# Altium PCB AmpClick2.PcbDoc
Units mm, origin at the board's own origin, x right, y up, seen from the top; angles counter-clockwise.
Board outline 25.4 x 57.28 mm, 2 copper layers (Top Layer, Bottom Layer); 43 components, 30 nets, 134 pads, 39 vias.
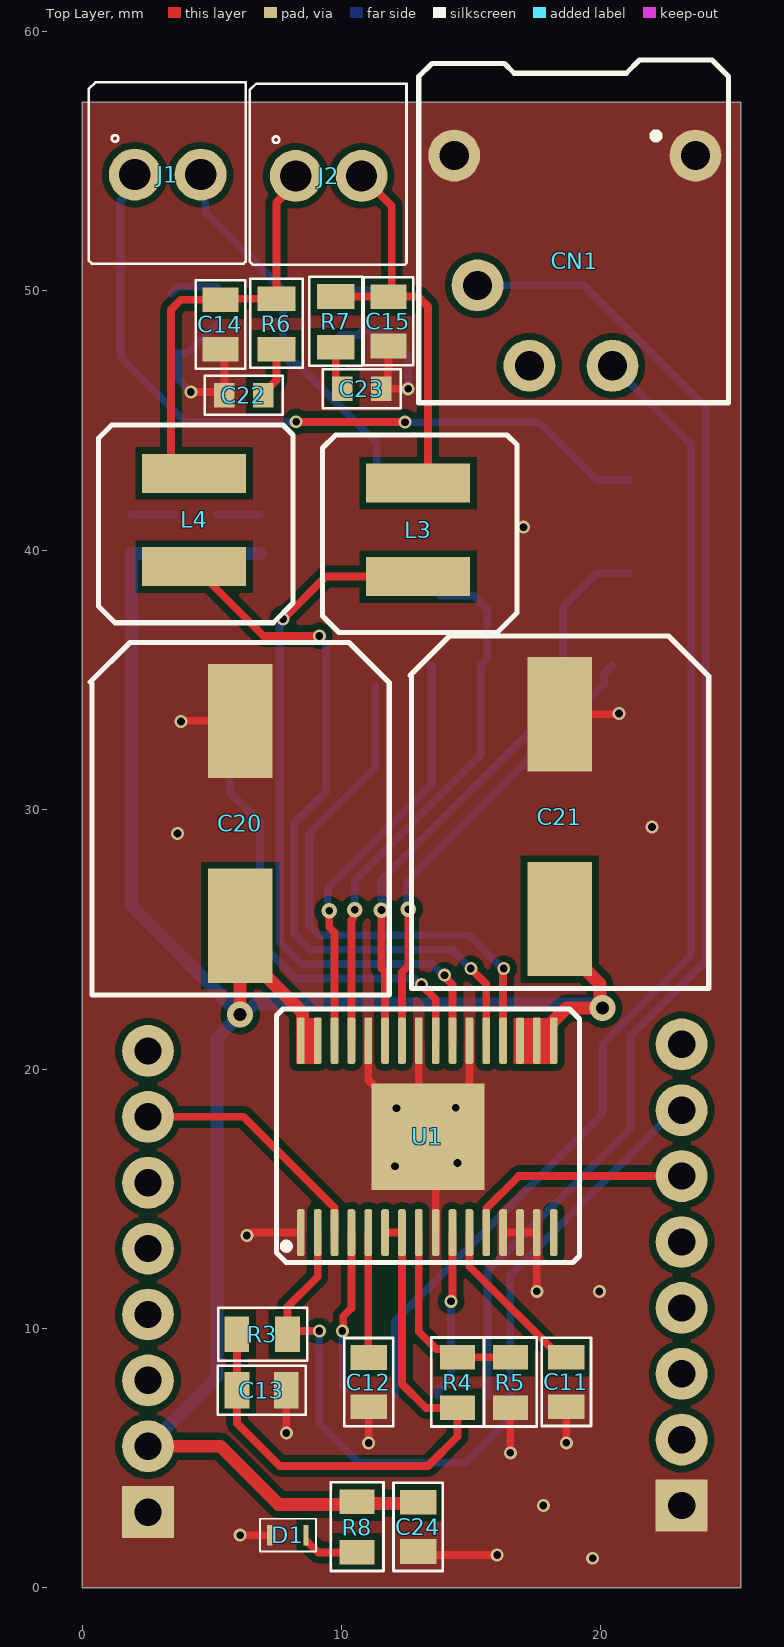
[diagram p0: Top Layer view]
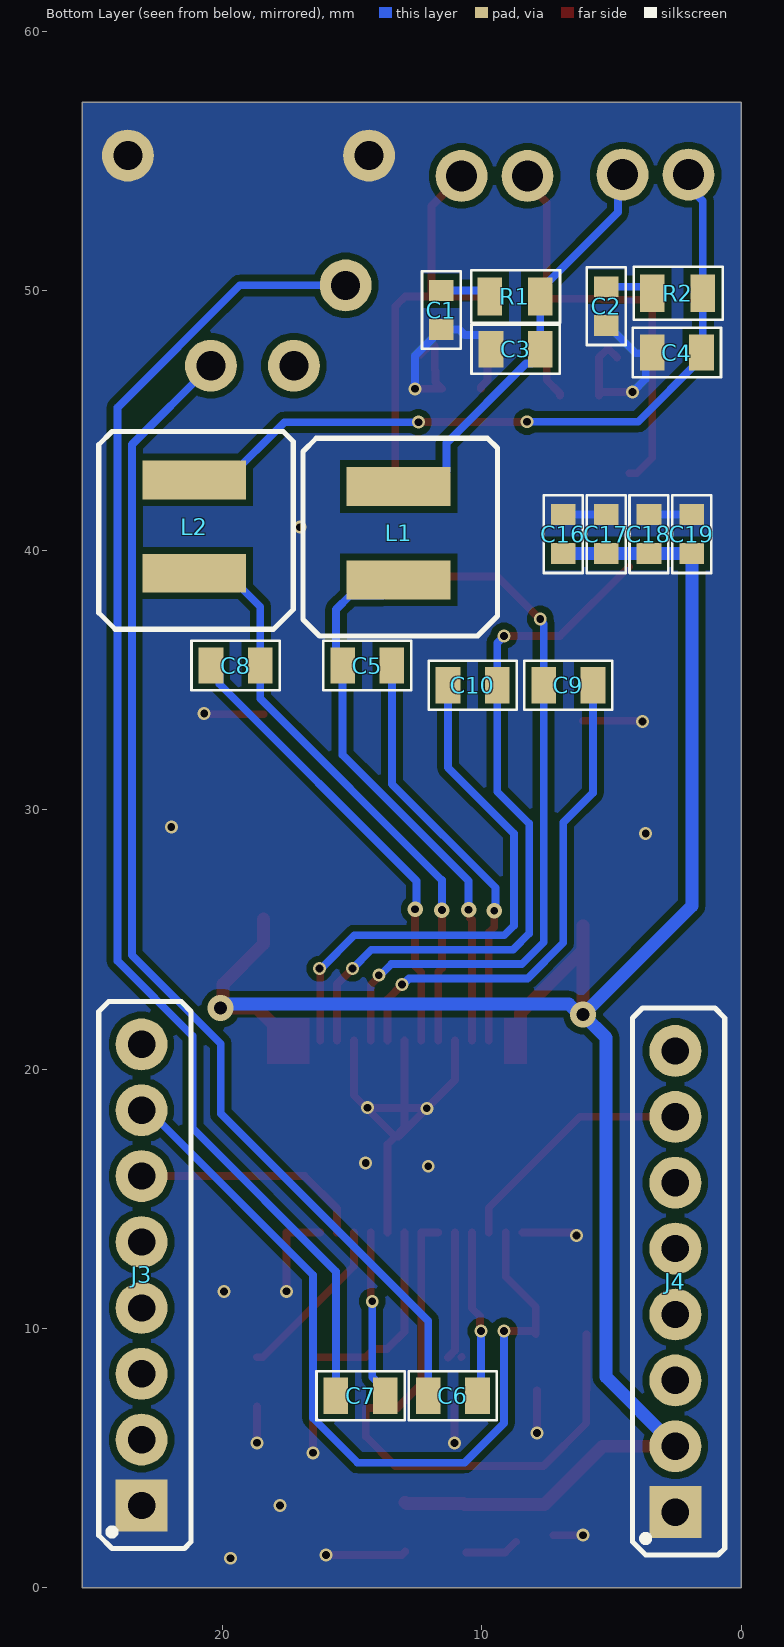
[diagram p1: Bottom Layer view, seen from below]
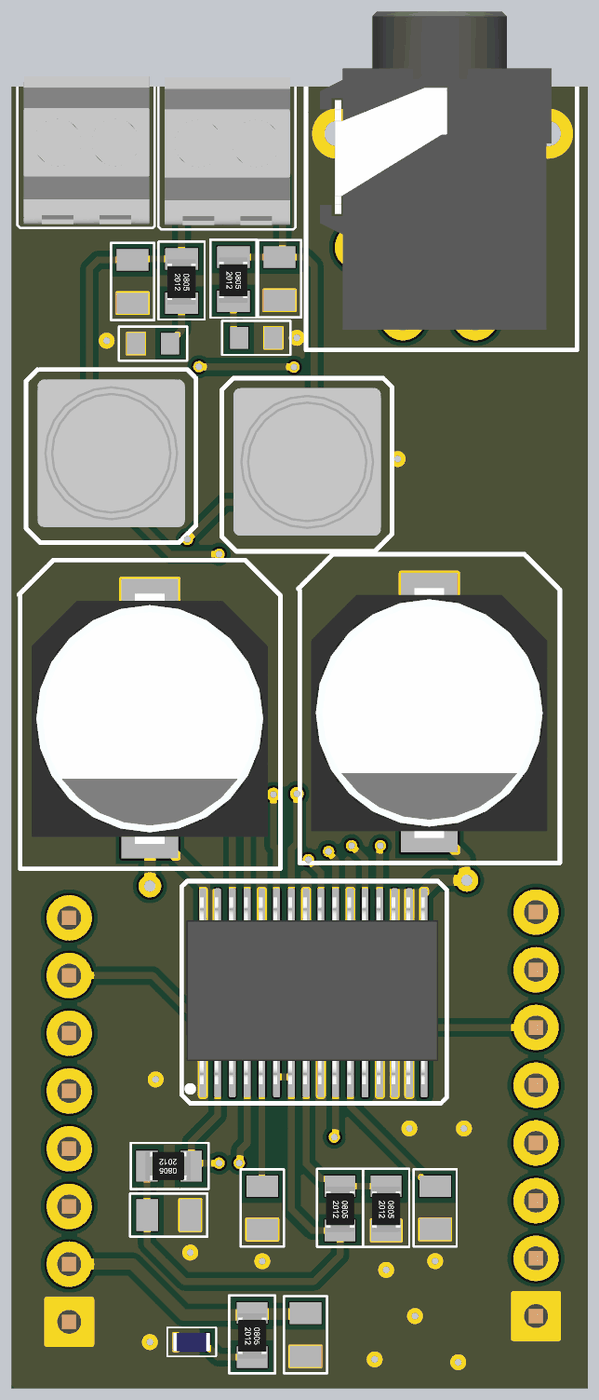
[diagram p2: 3D render of the assembled board from above, using the file's embedded part models]

## Layer stack, top to bottom
Top Solder: solder mask 0.0102, Solder Resist, Dk 3.5
Top Layer: signal copper 0.0356
Dielectric 1: dielectric 0.32, FR-4, Dk 4.8
Bottom Layer: signal copper 0.0356
Bottom Solder: solder mask 0.0102, Solder Resist, Dk 3.5

## Board outline
0,0 0,57.277 25.4,57.277 25.4,0

## Design rules (kind name [scope] priority, off if disabled: settings)
Clearance [All] p1: gap=0.254 ignorepadtopadclearanceinfootprint=FALSE except(0: Arc-Hole Track-Hole SMDPad-Hole THPad-Hole Via-Hole Fill-Hole Poly-Hole Region-Hole Text-Hole)
MinimumSolderMaskSliver [All] p1: minsoldermaskwidth=0.1
PolygonConnect [All] p1: connectstyle=Direct reliefconductorwidth=0.254 reliefentries=4 polygonreliefangle="90 Angle" airgapwidth=0.254
RoutingVias [All] p1: holewidth=0.711 width=1.27 viastyle="Through Hole" minholewidth=0.279 minwidth=0.61 maxholewidth=0.711 maxwidth=1.27
SolderMaskExpansion [All] p1: expansion=0.102 istentingtop=FALSE
Width Width_1 [InNet ('+5')] p1: maxlimit=0.5 minlimit=0.5 preferedwidth=0.5 minimp=50.000000 maximp=50.000000 favimp=50.000000
Width [All] p2: maxlimit=0.3 minlimit=0.3 preferedwidth=0.3 minimp=50.000000 maximp=50.000000 favimp=50.000000
29 further rules are at their usual default settings.

## Classes and differential pairs
component class AmpClickShematic: C1 C2 C3 C4 C5 C6 C7 C8 C9 C10 C11 C12 C13 C14 C15 C16 C17 C18 C19 C20 C21 C22 C23 C24 CN1 D1 J1 J2 J4 L1 L2 L3 L4 R1 R2 R3 R4 R6 R7 R8

## Components (designator, comment, footprint, x,y, rotation, side; value= is the part's Value field where it differs from the comment)
C1 "10nF" "CAP 10nF" 11.557,50.014 r180 bottom
C2 "10nF" "CAP 10nF" 5.207,50.165 r180 bottom
C3 "680nF" "CAP 680nF" 7.747,47.752 r270 bottom
C4 "680nF" "CAP 680nF" 1.529,47.625 r270 bottom
C5 "220nF" "CAP 220nF" 13.467,35.56 r270 bottom
C6 "1uF" "CAP 1uF" 12.065,7.366 r90 bottom
C7 "1uF" "CAP 1uF" 15.621,7.366 r90 bottom
C8 "220nF" "CAP 220nF" 20.442,35.56 r90 bottom
C9 "220nF" "CAP 220nF" 5.715,34.798 r270 bottom
C10 "220nF" "CAP 220nF" 11.303,34.798 r90 bottom
C11 "1uF" "CAP 1uF" 18.628,8.887 r0 top
C12 "1uF" "CAP 1uF" 11.008,8.882 r0 top
C13 "1uF" "CAP 1uF" 5.977,7.579 r90 top
C14 "680nF" "CAP 680nF" 5.334,49.657 r0 top
C15 "680nF" "CAP 680nF" 11.811,49.779 r0 top
C16 "1nF" "CAP 1nF" 6.858,39.878 r0 bottom
C17 "100nF" "CAP 100nF" 5.207,39.878 r0 bottom
C18 "1nF" "CAP 1nF" 3.556,39.878 r0 bottom
C19 "100nF" "CAP 100nF" 1.905,39.878 r0 bottom
C20 "100uF" "CAP ALUM 100uF" 6.096,25.527 r90 top
C21 "100uF" "CAP ALUM 100uF" 18.415,25.781 r90 top
C22 "10nF" "CAP 10nF" 6.985,45.974 r270 top
C23 "10nF" "CAP 10nF" 10.033,46.228 r90 top
C24 "1uF" "CAP 1uF" 12.913,3.299 r0 top
CN1 "Audio Jack" "Audio Jack" 23.647,55.217 r270 top
D1 "Green" "LED Green" 8.636,2.032 r270 top
J1 "R Speaker" "2P CONN 2.54mm" 2.032,54.483 r0 top
J2 "L Speaker" "2P CONN 2.54mm" 8.238,54.436 r0 top
J3 "8P HEADER" "8POS HEADER" 23.114,3.175 r90 bottom
J4 "8P HEADER" "8POS HEADER" 2.54,2.921 r90 bottom
L1 "Power Inductor 10uH" "Power Inductor" 13.208,38.862 r0 bottom value=10uH
L2 "Power Inductor 10uH" "Power Inductor" 21.082,39.116 r0 bottom value=10uH
L3 "Power Inductor 10uH" "Power Inductor" 12.954,38.989 r180 top value=10uH
L4 "Power Inductor 10uH" "Power Inductor" 4.318,39.37 r180 top value=10uH
R1 "3.24ohm" "SMD RES 3.24ohm" 7.747,49.784 r270 bottom value="3.24 Ohm"
R2 "3.24ohm" "SMD RES 3.24ohm" 1.479,49.911 r270 bottom value="3.24 Ohm"
R3 "100K" "SMD RES 100K" 7.919,9.779 r270 top value="100K Ohm"
R4 "100K" "SMD RES 100K" 14.478,8.89 r0 top value="100K Ohm"
R5 "SMD RES 39K" "SMD RES 39K" 16.51,8.89 r0 top value="39K Ohm"
R6 "3.24ohm" "SMD RES 3.24ohm" 7.493,49.702 r0 top value="3.24 Ohm"
R7 "3.24ohm" "SMD RES 3.24ohm" 9.779,49.784 r0 top value="3.24 Ohm"
R8 "1K" "SMD RES 1K" 10.602,3.319 r0 top
U1 "TPA 30W AMP." "TPA 30W AMP." 8.431,13.699 r90 top

## Footprints (in the part's own frame and the unit in brackets; to place one, negate y for a bottom-side part, rotate by r counter-clockwise, add the part's x,y. Pads: shape width x height; smd on the part's side, far side on the other; paste and mask are expansions set on the pad)
"2P CONN 2.54mm" [mm]
  round 2 hole 1.2 mask+0.05: 1(0,0) 2(2.54,0)
  silkscreen extent -1.78,-3.43 4.27,3.56, body extent -1.5,-3.25 4.04,3.25, height 10.5
"8POS HEADER" [mm]
  rect 2x2 hole 1.05: 1(0,0)
  round 2 hole 1.05: 2(2.54,0) 3(5.08,0) 4(7.62,0) 5(10.16,0) 6(12.7,0) 7(15.24,0) 8(17.78,0)
  silkscreen extent -1.65,-1.91 19.43,1.65, body extent -1.27,-1.27 19.05,1.27, height 9.27
"Audio Jack" [mm]
  round 2 hole 1.12: 1(0,0) 2(5,-8.4) 3(8.1,-3.2) 4(0,-9.3) ""(8.1,-6.4)
  silkscreen extent -3.68,-10.67 9.52,1.27, body extent -5.36,-10.05 8.64,0.15, height 6
"CAP 1nF" [mm]
  rect 0.95x0.8 smd mask+0.05: 1(0,0) 2(0,-1.5)
  silkscreen extent -0.75,-2.25 0.75,0.75, body extent -0.45,-1.6 0.45,0.1, height 0.8
"CAP 1uF" [mm]
  rect 1.4x0.95 smd mask+0.05: 1(0.041,0.003) 2(0.041,-1.897)
  silkscreen extent -0.91,-2.65 0.99,0.75, body extent -0.63,-2 0.72,0.1, height 1.25
"CAP 10nF" [mm]
  rect 0.95x0.8 smd mask+0.05: 1(0,0) 2(0,-1.5)
  silkscreen extent -0.75,-2.25 0.75,0.75, body extent -0.45,-1.6 0.45,0.1, height 0.8
"CAP 100nF" [mm]
  rect 0.95x0.8 smd mask+0.05: 1(0,0) 2(0,-1.5)
  silkscreen extent -0.75,-2.25 0.75,0.75, body extent -0.45,-1.6 0.45,0.1, height 0.8
"CAP 220nF" [mm]
  rect 1.4x0.95 smd mask+0.05: 1(0,0) 2(0,-1.9)
  silkscreen extent -0.95,-2.65 0.95,0.75, body extent -0.67,-2 0.67,0.1, height 1.25
"CAP 680nF" [mm]
  rect 1.4x0.95 smd mask+0.05: 1(0,0) 2(0,-1.9)
  silkscreen extent -0.95,-2.65 0.95,0.75, body extent -0.67,-2 0.67,0.1, height 1.25
"CAP ALUM 100uF" [mm]
  rect 4.4x2.5 smd: 1(0,0) 2(7.9,0)
  silkscreen extent -2.67,-5.75 10.92,5.78, body extent -1.56,-5.19 9.44,5.21, height 10.41
"LED Green" [mm]
  rect 0.8x0.2 smd mask+0.05: 1(0,0) 2(0,-1.4)
  silkscreen extent -0.64,-1.78 0.64,0.38, body extent -0.4,-1.5 0.4,0.1, height 0.8
"Power Inductor" [mm]
  rect 4x1.5 smd mask+0.05: 1(0,0) 2(0,-3.6)
  silkscreen extent -3.81,-5.46 3.68,2.16, body extent -3.33,-5.03 3.17,1.47, height 4.8
"SMD RES 1K" [mm]
  rect 1.35x0.95 smd mask+0.05: 1(0,0) 2(0,-1.95)
  silkscreen extent -1.02,-2.67 1.02,0.76, body extent -0.63,-2.02 0.63,-0.02, height 0.45
"SMD RES 3.24ohm" [mm]
  rect 1.45x0.95 smd mask+0.05: 1(0,0) 2(0,-1.95)
  silkscreen extent -1.02,-2.67 1.02,0.76, body extent -0.63,-2.02 0.63,-0.02, height 0.45
"SMD RES 39K" [mm]
  rect 1.35x0.95 smd mask+0.05: 1(0,0) 2(0,-1.95)
  silkscreen extent -1.02,-2.67 1.02,0.76, body extent -0.63,-2.02 0.63,-0.02, height 0.45
"SMD RES 100K" [mm]
  rect 1.35x0.95 smd mask+0.05: 1(0,0) 2(0,-1.95)
  silkscreen extent -1.02,-2.67 1.02,0.76, body extent -0.63,-2.02 0.63,-0.02, height 0.45
"TPA 30W AMP." [mm]
  rrect50% 1.8x0.3 smd mask+0.07: 1(0,0) 1(0,0) 2(0,-0.65) 3(0,-1.3) 4(0,-1.95) 5(0,-2.6) 6(0,-3.25) 7(0,-3.9) 8(0,-4.55) 9(0,-5.2) 10(0,-5.85) 11(0,-6.5) 12(0,-7.15) 13(0,-7.8) 14(0,-8.45) 15(0,-9.1) 16(0,-9.75) 17(7.4,-9.75) 18(7.4,-9.1) 19(7.4,-8.45) 20(7.4,-7.8) 21(7.4,-7.15) 22(7.4,-6.5) 23(7.4,-5.85) 24(7.4,-5.2) 25(7.4,-4.55) 26(7.4,-3.9) 27(7.4,-3.25) 28(7.4,-2.6) 29(7.4,-1.95) 30(7.4,-1.3) 31(7.4,-0.65) 32(7.4,0) 32(7.4,0)
  rect 4.11x4.36 smd mask+0.05: 33(3.7,-4.904)
  silkscreen extent -1.16,-10.75 8.62,0.94, body extent -0.32,-10.38 7.9,0.72, height 1.1

## Part data
C1 C2 C22 C23: library part "CAP 10nF"
C3 C4 C14 C15: library part "CAP 680nF"
C5 C8 C9 C10: library part "CAP 220nF"
C6 C7 C11 C12 C13 C24: library part "CAP 1uF"
C16 C18: library part "CAP 1nF"
C17 C19: library part "CAP 100nF"
C20 C21: library part "CAP ALUM 100uF"
D1: library part "LED Green", Name="LED Green"
J1 J2: library part "2P CONN", Name=282823-2
J3 J4: "8 Position Header", Name=PH1-08-UA
R1 R2 R6 R7: library part "SMD RES 3.24OHM"
R3 R4: library part "SMD RES 100K"
R8: library part "SMD RES 1K"
U1: "TPA 2x30W IC", Name=TPA3128D2
CN1: Name=SJ-43514

## Via types
v1: diameter 0.5, hole 0.3, Top Layer to Bottom Layer, 33 vias
v2: diameter 0.6, hole 0.3, Top Layer to Bottom Layer, 4 vias
v3: diameter 1, hole 0.5, Top Layer to Bottom Layer, 2 vias

## Nets (pads, with @x,y where several pads share a name; then routed paths per layer and width w, separated by ;. In a path a pad name is that pad's centre, name@x,y a point inside that pad or via, vN(x,y) a via of type N, cw(c..) or ccw(c..) an arc to the next point about the centre after c; other vN are vias at no path point)
+5: C16.1 C17.1 C18.1 C19.1 C20.1 C21.1 C24.1 J4.2 R8.1 U1.17 U1.18 U1.19 U1.31 U1.32 | length 83.4
  Top Layer w0.5: J4.2 5.334,5.461 7.575,3.22 10.668,3.22 10.709,3.261 12.913,3.261 C24.1 ; v3(6.096,22.098) C20.1@6.096,24.577 ; C20.1 C20.1@6.096,24.577 ; 8.7,21.082 8.505,21.277 8.505,22.168 C20.1@6.096,24.577 ; U1.18 17.531,21.214 18.669,22.352 v3(20.066,22.352) 19.97,22.448 19.97,23.276 18.415,24.831 C21.1
  Bottom Layer w0.5: J4.2 5.207,8.128 5.207,21.209 v3(6.096,22.098) ; C16.1 C17.1 C18.1 C19.1 1.905,26.289 v3(6.096,22.098) ; v3(20.066,22.352) 19.931,22.352 19.773,22.51 6.643,22.51 6.231,22.098 v3(6.096,22.098)
GND: C1.2 C2.2 C3.2 C4.2 C11.2 C12.2 C13.2 C14.2 C15.2 C16.2 C17.2 C18.2 C19.2 C20.2 C21.2 C22.2 C23.2 C24.2 CN1.1 CN1.4 D1.2 J3.1 J4.1 R5.2 U1.1 U1.9 U1.13 U1.14 U1.15 U1.22 U1.25 U1.28 U1.33 | length 61.8
  Top Layer w0.3: v1(3.81,33.401) 3.836,33.427 C20.2 ; v1@4.229,46.139 v1(4.191,46.101) 5.358,46.101 C22.2 5.485,47.432 5.16,47.757 5.109,47.757 C14.2@4.784,47.432 ; v1(6.096,2.032) D1.2 ; v1(6.35,13.589) 6.404,13.589 6.514,13.699 U1.1@8.431,13.699 ; v1(7.874,5.969) C13.2 ; U1.28 11.031,19.578 13.21,17.399 U1.33 ; v1(11.049,5.588) C12.2 ; v1(12.121,18.488) U1.33@14.381,18.488 ; U1.33@12.147,18.514 v1(14.407,18.514) ; C15.2@12.361,47.554 12.036,47.879 C15.2 11.811,46.954 11.783,46.926 11.783,46.478 C23.2 v1(12.573,46.228) ; C24.2 13.086,1.27 v1(16.002,1.27) ; U1.25 12.981,17.753 U1.33 ; U1.9 13.631,17.103 U1.33 ; U1.22 14.931,18.995 U1.33 ; U1.13 U1.14 U1.15 v1(17.531,11.435) v1@17.526,11.43 ; v1(16.51,5.207) R5.2 ; C21.2 v1@20.675,33.681 ; v1@18.631,5.631 v1(18.669,5.593) C11.2
  Bottom Layer w0.3: C19.2 C18.2 ; C4.2 C4.2@3.457,47.597 ; v1(4.191,46.101) 3.683,46.609 3.683,47.371 C4.2@3.457,47.597 ; C17.2 C16.2 ; C2.2 5.132,48.665 4.064,47.597 C4.2@3.457,47.597 ; C3.2 9.647,47.977 9.972,48.302 10.659,48.302 10.87,48.514 C1.2 11.632,48.514 11.882,48.264 11.882,48.189 12.573,47.498 v1(12.573,46.228)
  other v1: 19.685,1.143 17.78,3.175 19.939,11.43 12.065,16.256 14.478,16.383 3.683,29.083 21.971,29.337 20.701,33.707 17.018,40.894
NetC1_1: C1.1 R1.2 | length 2
  Bottom Layer w0.3: R1.2 9.927,50.014 C1.1
NetC2_1: C2.1 R2.2 | length 1.9
  Bottom Layer w0.3: R2.2 3.683,50.165 C2.1
NetC3_1: C3.1 J1.2 L1.2 R1.1 | length 16.5
  Bottom Layer w0.3: J1.2 4.748,54.307 4.748,53.033 7.747,50.034 R1.1 C3.1 7.747,47.527 8.072,47.202 8.297,47.202 11.358,44.141 11.358,43.062 11.958,42.462 L1.2
NetC4_1: C4.1 J1.1 L2.2 R2.1 | length 28.8
  Top Layer w0.3: v1(8.255,44.958) 8.264,44.949 12.437,44.949 v1(12.446,44.939)
  Bottom Layer w0.3: J1.1 2.032,54.023 1.479,53.47 1.479,47.675 C4.1 1.529,47.4 3.971,44.958 v1(8.255,44.958) ; v1(12.446,44.939) 17.609,44.939 19.832,42.716 L2.2
NetC5_1: C5.1 U1.30 | length 16.2
  Top Layer w0.3: v2(9.524,26.105) 9.524,25.469 9.731,25.262 U1.30
  Bottom Layer w0.3: v2(9.524,26.105) 9.467,26.162 9.467,26.993 13.467,30.993 C5.1
NetC5_2: C5.2 L1.1 U1.29 | length 21.7
  Top Layer w0.3: U1.29 10.381,25.759 10.451,25.829 10.451,26.087 v2(10.508,26.145)
  Bottom Layer w0.3: v2(10.508,26.145) 10.508,27.251 15.367,32.11 C5.2 15.621,35.814 15.621,37.719 15.078,38.262 13.808,38.262 L1.1
NetC6_1: C6.1 CN1.3 | length 46
  Top Layer w0.3: CN1.3 CN1.3@20.664,46.9
  Bottom Layer w0.3: C6.1 12.068,10.29 20.066,18.288 20.066,20.976 23.486,24.396 23.486,44.078 CN1.3
NetC6_2: C6.2 U1.4 | length 6.2
  Top Layer w0.3: v1(10.033,9.906) 10.071,9.944 10.071,10.472 10.381,10.782 U1.4
  Bottom Layer w0.3: v1(10.033,9.906) 10.033,7.733 C6.2@10.101,7.665
NetC7_1: C7.1 CN1.2 | length 52.3
  Bottom Layer w0.3: CN1.2 19.333,50.217 24.04,45.51 24.04,24.167 21.145,21.273 21.145,17.716 15.624,12.195 C7.1
NetC7_2: C7.2 U1.10 | length 6.5
  Top Layer w0.3: v1(14.224,11.049) 14.224,11.103 14.281,11.16 U1.10
  Bottom Layer w0.3: C7.2 13.724,7.632 14.224,8.132 v1(14.224,11.049)
NetC8_1: C8.1 U1.26 | length 17.9
  Top Layer w0.3: U1.26 12.331,23.737 12.573,23.979 v2(12.573,26.162)
  Bottom Layer w0.3: v2(12.573,26.162) 12.516,26.219 12.516,27.25 20.117,34.852 20.117,35.235 C8.1
NetC8_2: C8.2 L2.1 U1.27 | length 22.8
  Top Layer w0.3: v2(11.539,26.131) 11.539,23.888 11.681,23.746 U1.27
  Bottom Layer w0.3: v2(11.539,26.131) 11.539,27.287 18.542,34.29 C8.2 18.542,37.826 19.832,39.116 L2.1
NetC9_1: C9.1 U1.24 | length 19.7
  Top Layer w0.3: v1(13.081,23.264) 13.081,23.241 13.631,22.691 U1.24
  Bottom Layer w0.3: C9.1 5.715,30.649 6.858,29.506 6.858,24.871 8.234,23.495 12.805,23.495 13.036,23.264 v1(13.081,23.264)
NetC9_2: C9.2 L3.1 U1.23 | length 27.9
  Top Layer w0.3: v1(7.747,37.357) 7.756,37.347 9.398,38.989 L3.1 ; v1(13.97,23.622) 13.97,23.568 14.281,23.257 U1.23
  Bottom Layer w0.3: v1(7.747,37.357) 7.747,37.303 7.615,37.171 C9.2 7.615,24.897 8.463,24.049 13.489,24.049 13.916,23.622 v1(13.97,23.622)
NetC10_1: C10.1 U1.20 | length 21.3
  Top Layer w0.3: U1.20 16.231,23.851 v1(16.256,23.876)
  Bottom Layer w0.3: C10.1 11.303,31.623 8.763,29.083 8.763,25.527 9.133,25.157 14.921,25.157 16.202,23.876 v1(16.256,23.876)
NetC10_2: C10.2 L4.1 U1.21 | length 28.4
  Top Layer w0.3: L4.1 6.985,36.703 v1(9.144,36.703) ; v1(14.986,23.876) 15.581,23.281 U1.21
  Bottom Layer w0.3: v1(9.144,36.703) 9.144,36.686 9.403,36.427 C10.2 9.403,30.698 8.169,29.464 8.169,25.232 8.798,24.603 14.259,24.603 v1(14.986,23.876)
NetC11_1: C11.1 U1.11 | length 6.5
  Top Layer w0.3: U1.11 14.931,12.403 18.444,8.89 C11.1
NetC12_1: C12.1 U1.5 | length 5
  Top Layer w0.3: C12.1@10.777,8.908 C12.1@10.795,8.89 ; U1.5 11.031,9.157 C12.1@11.303,8.885
NetC13_1: C13.1 R3.2 R4.2 U1.6 U1.7 | length 23.2
  Top Layer w0.3: R3.2 5.969,7.625 C13.1 5.974,6.345 7.62,4.699 13.335,4.699 14.478,5.842 R4.2 13.253,6.94 12.331,7.862 U1.7 U1.6
NetC14_1: C14.1 J2.1 L4.2 R6.1 | length 16.1
  Top Layer w0.3: L4.2 4.029,42.97 3.429,43.57 3.429,49.276 3.81,49.657 C14.1 5.379,49.702 R6.1 7.493,53.41 8.238,54.155 J2.1
NetC15_1: C15.1 J2.2 L3.2 R7.1 | length 15.8
  Top Layer w0.3: R7.1 C15.1@11.938,49.784 ; J2.2 11.938,53.276 C15.1@11.938,49.784 ; L3.2 13.335,42.97 13.335,49.403 13.08,49.658 12.954,49.784 C15.1@11.938,49.784
NetC22_1: C22.1 R6.2 | length 2
  Top Layer w0.3: C22.1 6.985,46.049 7.493,46.557 R6.2
NetC23_1: C23.1 R7.2 | length 1.7
  Top Layer w0.3: R7.2 9.779,46.557 10.033,46.303 C23.1
NetD1_1: D1.1 R8.2 | length 2.1
  Top Layer w0.3: D1.1@8.686,1.782 9.099,1.369 R8.2
NetJ3_6: J3.6 U1.12 | length 8.7
  Top Layer w0.3: U1.12 15.581,14.626 16.83,15.875 J3.6@22.86,15.875
NetJ3_7: J3.7 R3.1 U1.2 | length 32.4
  Top Layer w0.3: U1.2 9.081,12.002 7.919,10.84 R3.1 8.046,9.906 v1(9.144,9.906)
  Bottom Layer w0.3: v1(9.144,9.906) 9.144,6.35 10.668,4.826 14.789,4.826 16.503,6.54 16.503,12.058 J3.7@22.86,18.415
NetJ4_7: J4.7 U1.3 | length 9.6
  Top Layer w0.3: J4.7 6.223,18.161 9.731,14.653 U1.3
NetR4_1: R4.1 R5.1 U1.8 | length 7.8
  Top Layer w0.3: U1.8 12.981,9.879 13.645,9.215 14.153,9.215 R4.1 R5.1
pads on no net: CN1. J3.2 J3.3 J3.4 J3.5 J3.8 J4.3 J4.4 J4.5 J4.6 J4.8 U1.16

## Polygon pours and split planes (outlines as drawn)
GND on Bottom Layer "GND_L02_P001" (solid, pour order 1): 0,57.277 25.4,57.277 25.4,0.127 25.527,0 0,0
GND on Top Layer "GND_L01_P000" (solid, pour order 0): 0,57.277 25.4,57.277 25.4,0.127 25.527,0 0.127,0 0,0.127

## Other copper
Top Layer:
  rectangle net +5: 16.637,20.193 18.288,21.971
  rectangle net +5: 8.255,20.193 9.144,21.971